# Altium PCB Pedal Board.PcbDoc
Units mm, origin at the board's own origin, x right, y up, seen from the top; angles counter-clockwise.
Board outline 50 x 50 mm, 2 copper layers (Top Layer, Bottom Layer); 56 components, 29 nets, 193 pads, 105 vias.
Unrouted connection lines stored in the file: 36.
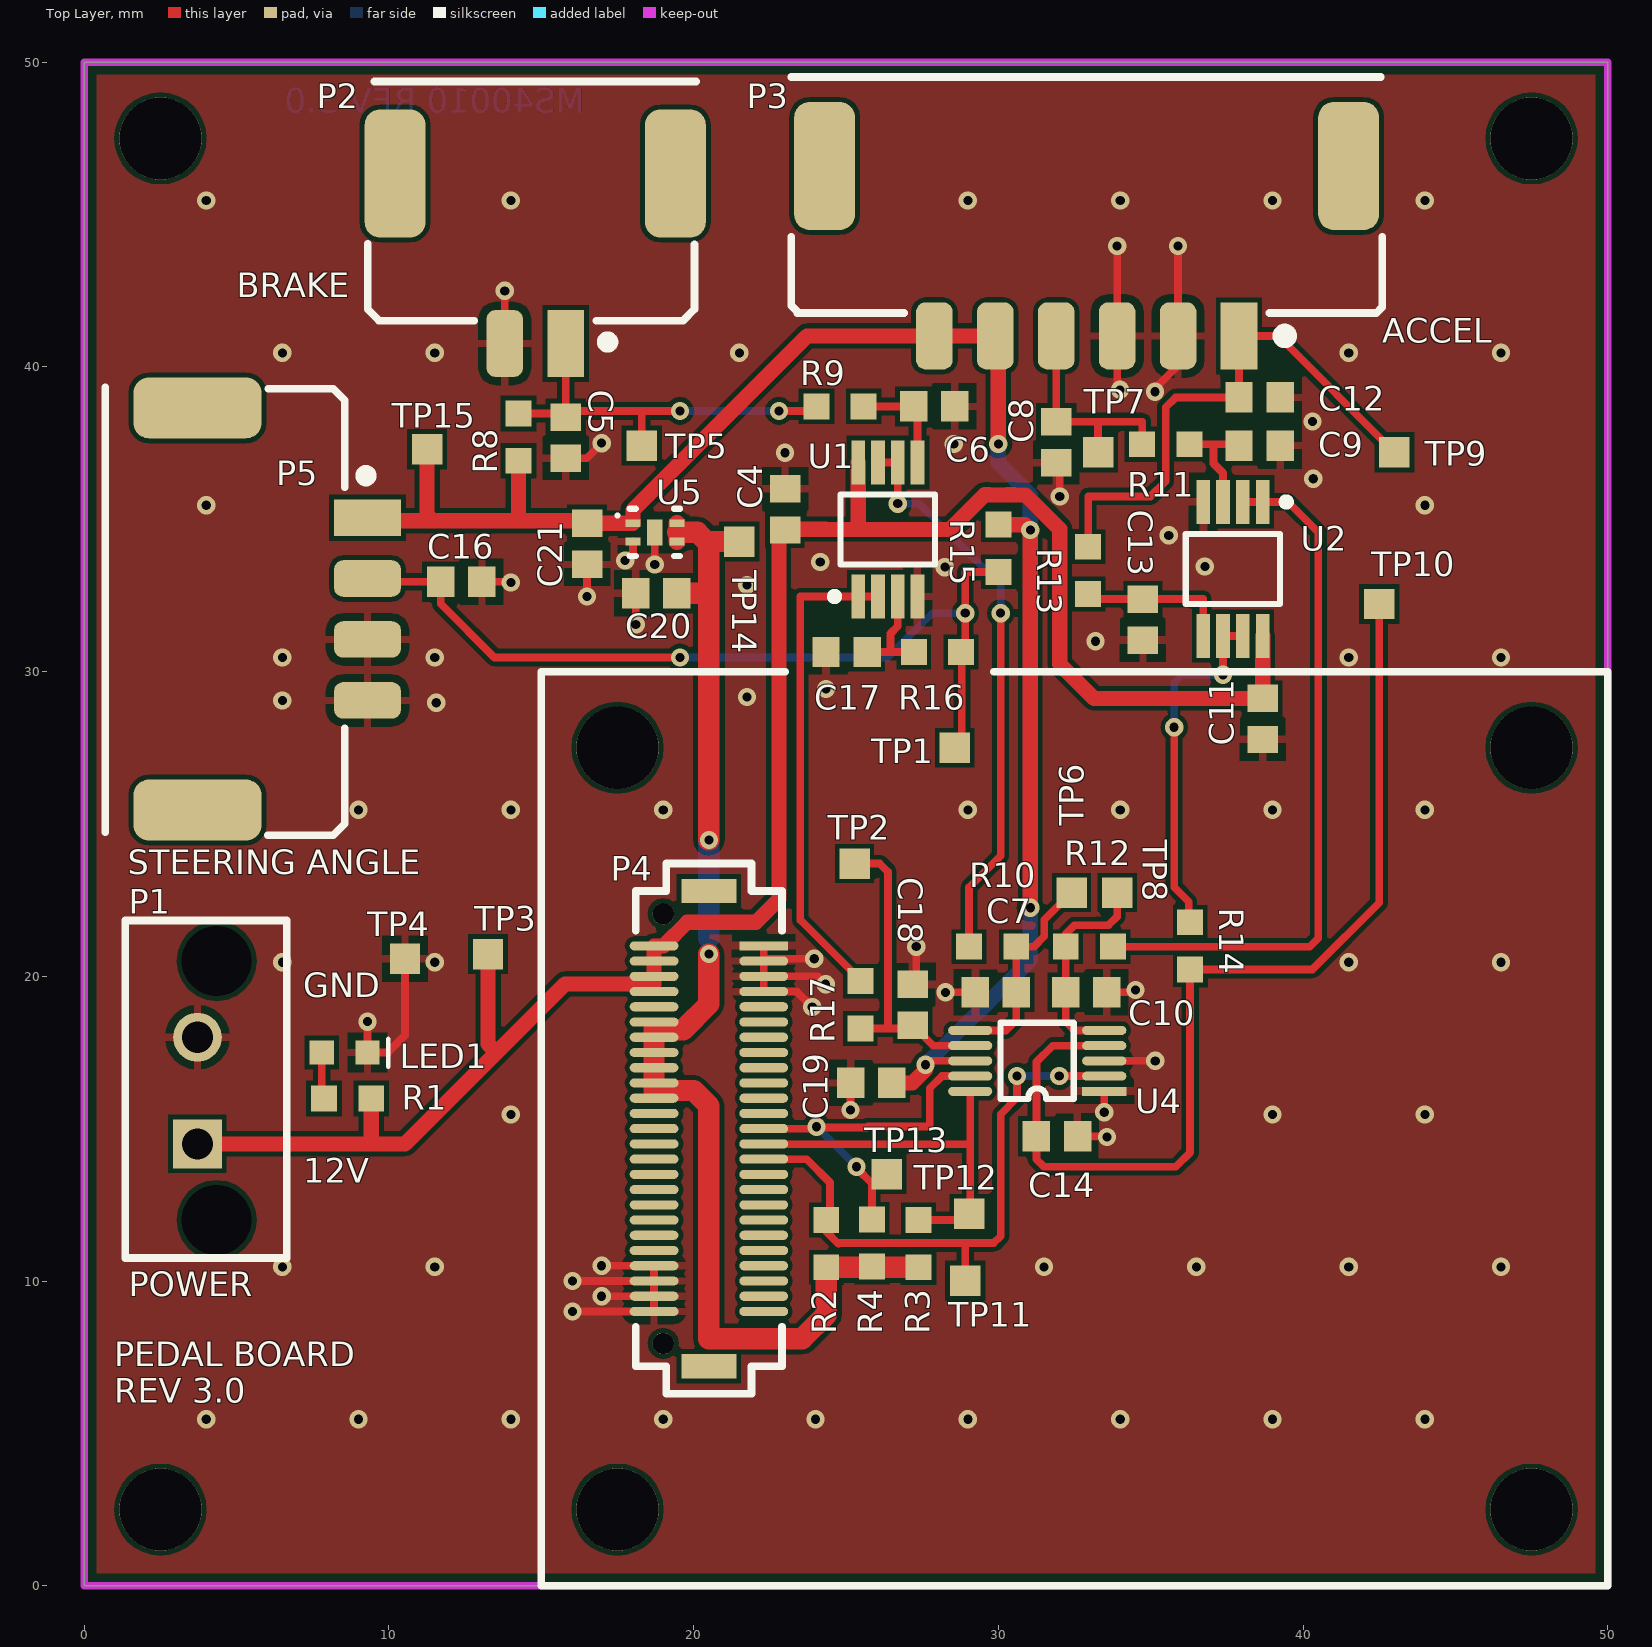
[diagram p0: Top Layer view]
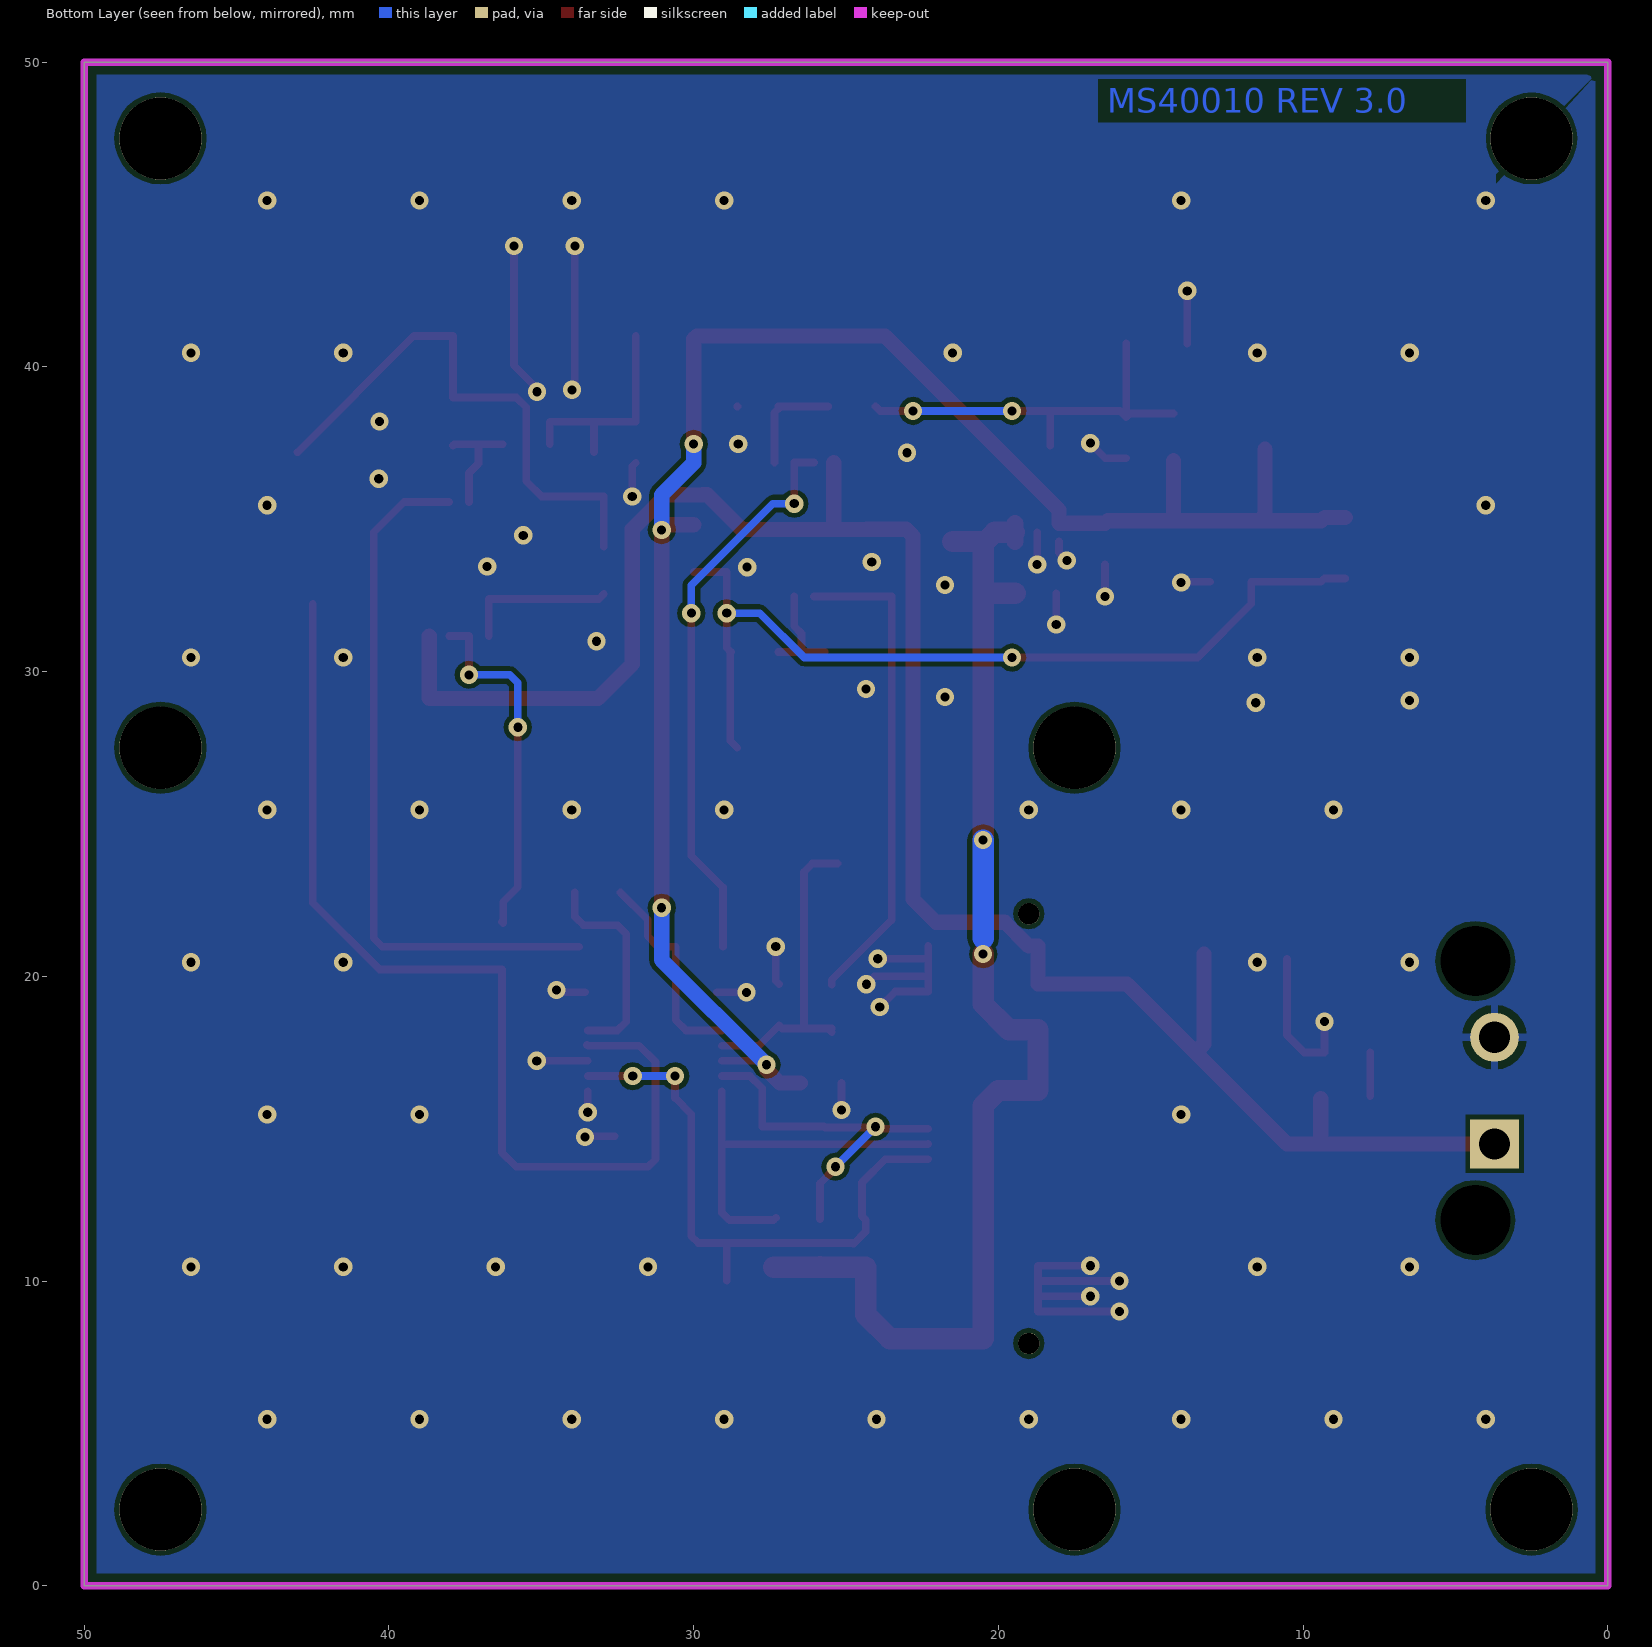
[diagram p1: Bottom Layer view, seen from below]
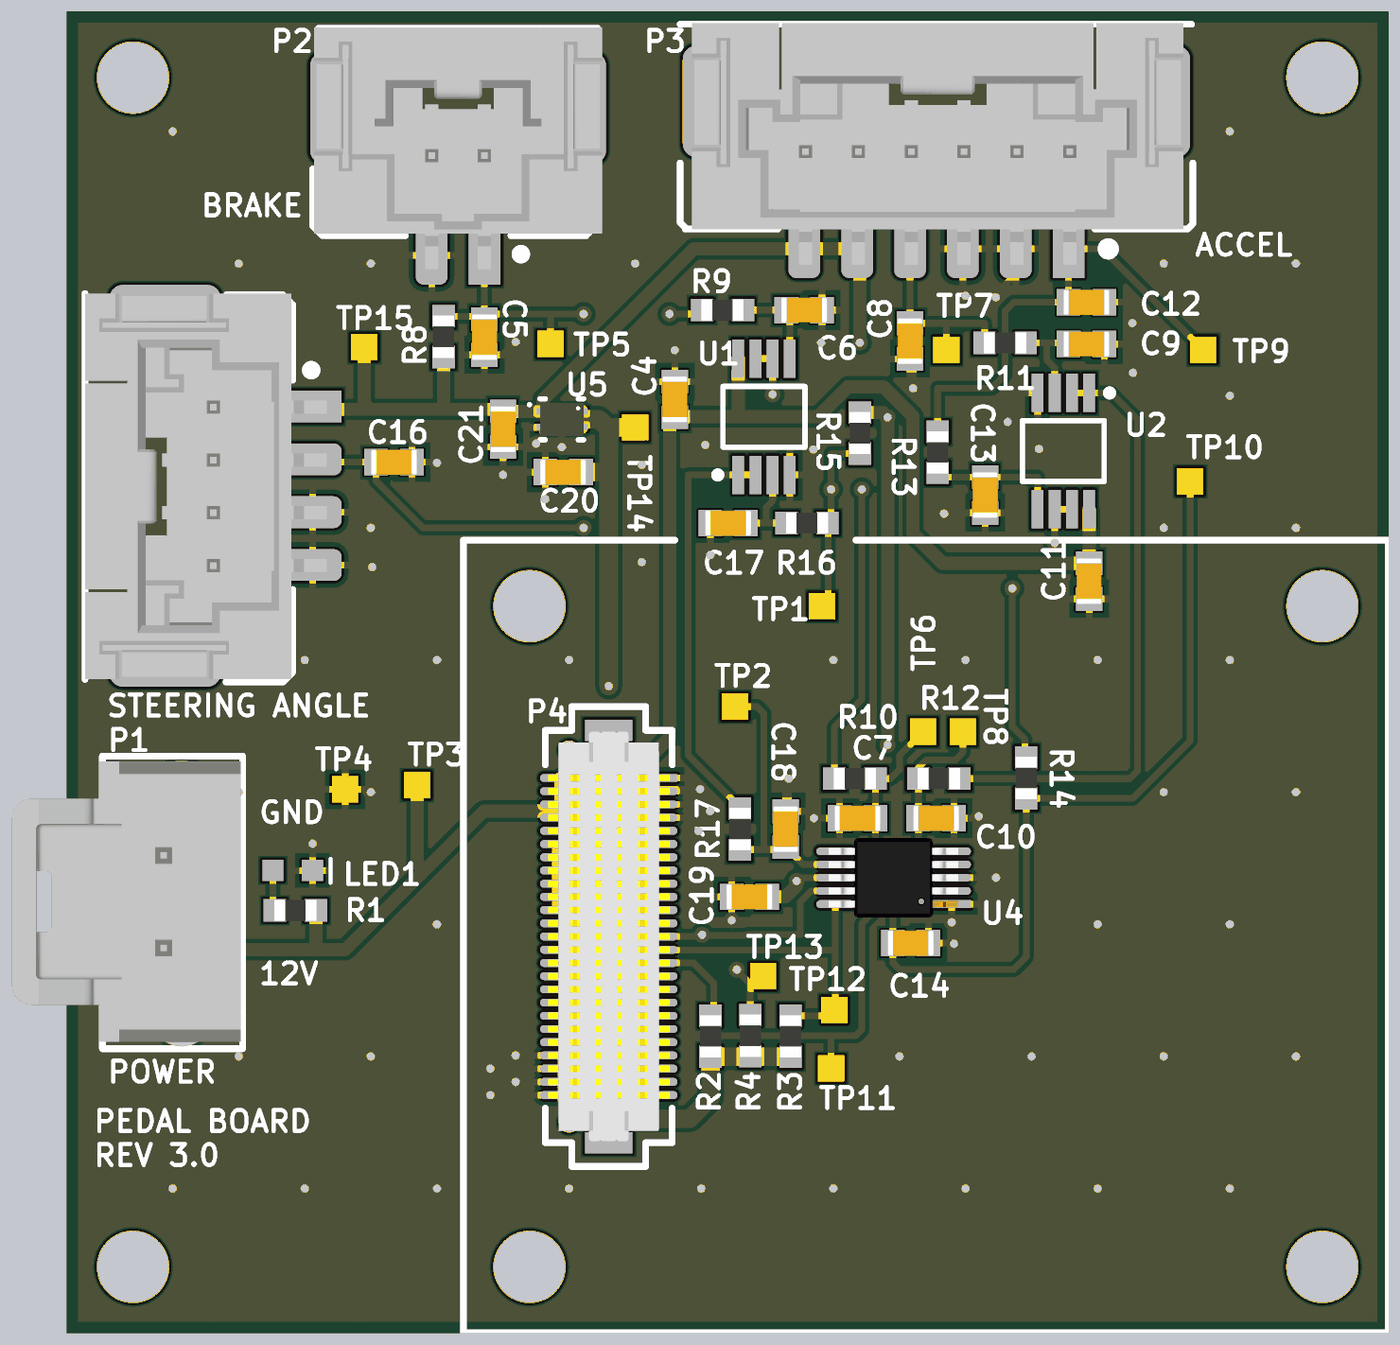
[diagram p2: 3D render of the assembled board from above, using the file's embedded part models]

## Layer stack, top to bottom
Top Solder: solder mask 0.0102, Solder Resist, Dk 3.5
Top Layer: signal copper 0.0356
Dielectric 1: dielectric 0.32, FR-4, Dk 4.8
Bottom Layer: signal copper 0.0356
Bottom Solder: solder mask 0.0102, Solder Resist, Dk 3.5

## Board outline
0,0 0,50 50,50 50,0

## Design rules (kind name [scope] priority, off if disabled: settings)
BoardOutlineClearance [All] p1: gap=0.406 ignorepadtopadclearanceinfootprint=FALSE
Clearance [All] p1: gap=0.152 ignorepadtopadclearanceinfootprint=FALSE except(0: Arc-Hole Track-Hole SMDPad-Hole THPad-Hole Via-Hole Fill-Hole Poly-Hole Region-Hole Text-Hole)
ComponentClearance ComponentClearance_ControllerBoard [InComponent('P4') vs Identifier = 'Controller_Board'] p1: gap=0 collisioncheckmode=3 verticalgap=0 showdistances=FALSE
ComponentClearance ComponentClearance_Standoffs [Identifier = 'Standoff' vs Identifier = 'Controller_Board'] p2: gap=0 collisioncheckmode=3 verticalgap=0 showdistances=FALSE
ComponentClearance [All] p3: gap=0.254 collisioncheckmode=3 verticalgap=0.254 showdistances=FALSE
HoleSize [All] p1: absolutevalues=TRUE maxlimit=6.3 minlimit=0.3 maxpercent=80.000 minpercent=20.000
MinimumAnnularRing [All] p1: minimumring=0.05
MinimumSolderMaskSliver [All] p1: minsoldermaskwidth=0.1
PolygonConnect [IsPad] p1: connectstyle=Relief reliefconductorwidth=0.254 reliefentries=4 polygonreliefangle="90 Angle" airgapwidth=0.254
PolygonConnect PolygonConnect_NoThermal [Not(IsPad)] p2: connectstyle=Direct reliefconductorwidth=0.254 reliefentries=4 polygonreliefangle="90 Angle" airgapwidth=0.254
RoutingVias [All] p1: holewidth=0.3 width=0.6 viastyle="Through Hole" minholewidth=0.3 minwidth=0.6 maxholewidth=0.711 maxwidth=1.27
SilkToSolderMaskClearance [IsPad] p1: minsilkscreentomaskgap=0.178 clearancetoexposedcopper=TRUE
SolderMaskExpansion [All] p1: expansion=0.102
Width [All] p1: maxlimit=2.54 minlimit=0.152 preferedwidth=0.254
26 further rules are at their usual default settings.

## Classes and differential pairs
component class "Pedal Board - ADC": C19 C20 C21 R2 R3 R4 TP11 TP12 TP13 TP14 TP15 U4 U5
component class PedalBoard: LED1 P1 P2 P3 P4 P5 R1 TP3 TP4
component class PedalBoardAnalogInputs: C4 C5 C6 C7 C8 C9 C10 C11 C12 C13 C14 C16 C17 C18 R8 R9 R10 R11 R12 R13 R14 R15 R16 R17 TP1 TP2 TP5 TP6 TP7 TP8 TP9 TP10 U1 U2

## Components (designator, comment, footprint, x,y, rotation, side; value= is the part's Value field where it differs from the comment)
C4 "CAP CER 10nF 50V 5% X7R 0603" "CAP, 0603" 23,35.325 r90 top
C5 "CAP CER 10nF 50V 5% X7R 0603" "CAP, 0603" 15.8,37.682 r270 top
C6 "CAP CER 0.1UF 50V 10% X7R 0603" "CAP, 0603" 27.895,38.707 r0 top
C7 "CAP CER 10nF 50V 5% X7R 0603" "CAP, 0603" 29.914,19.475 r180 top
C8 "CAP CER 10nF 50V 5% X7R 0603" "CAP, 0603" 31.9,37.532 r270 top
C9 "CAP CER 0.1UF 50V 10% X7R 0603" "CAP, 0603" 38.575,37.421 r0 top
C10 "CAP CER 10nF 50V 5% X7R 0603" "CAP, 0603" 32.889,19.475 r0 top
C11 "CAP CER 10nF 50V 5% X7R 0603" "CAP, 0603" 38.675,28.447 r270 top
C12 "CAP CER 10nF 50V 5% X7R 0603" "CAP, 0603" 38.575,39 r0 top
C13 "CAP CER 0.1UF 50V 10% X7R 0603" "CAP, 0603" 34.745,31.707 r270 top
C14 "CAP CER 10nF 50V 5% X7R 0603" "CAP, 0603" 31.925,14.75 r0 top
C16 "CAP CER 10nF 50V 5% X7R 0603" "CAP, 0603" 12.375,32.95 r0 top
C17 "CAP CER 0.1UF 50V 10% X7R 0603" "CAP, 0603" 25.019,30.646 r180 top
C18 "CAP CER 10nF 50V 5% X7R 0603" "CAP, 0603" 27.195,19.066 r90 top
C19 "CAP CER 0.1UF 50V 10% X7R 0603" "CAP, 0603" 25.825,16.5 r180 top
C20 "CAP CER 1UF 50V 10% X7R 0603" "CAP, 0603" 18.775,32.571 r180 top
C21 "CAP CER 1UF 50V 10% X7R 0603" "CAP, 0603" 16.5,34.196 r270 top
LED1 "LED GREEN CLEAR 2V 0603" LED_0603 7.844,17.49 r0 top
P1 "CONN 2POS ULTRA-FIT 0.138\"" "CONN, 2POS ULTRA-FIT" 3.714,14.5 r90 top
P2 "DURA-CLIK" "CONN, 2POS Dura-Click Vertical" 15.8,40.77 r180 top
P3 "DURA-CLIK" "CONN, 6POS DURA-CLIK VERT" 37.9,41.02 r180 top
P4 "CONN 50POS Bergstak Plug 0.02\"" "CONN, Bergstak 50 Pos Plug" 20.5,15 r0 top locked
P5 "Dura-Clik" "CONN, 4POS DURA-CLIK VERT" 9.294,35.057 r270 top
R1 "RES 4.7K OHM 1% 1/10W 0603" "RES, 0603" 8.644,15.99 r180 top
R2 "RES 4.7K OHM 1% 1/10W 0603" "RES, 0603" 24.351,11.225 r90 top
R3 "RES 4.7K OHM 1% 1/10W 0603" "RES, 0603" 27.382,11.225 r90 top
R4 "RES 4.7K OHM 1% 1/10W 0603" "RES, 0603" 25.857,11.25 r90 top
R8 "RES 1K" "RES, 0603" 14.25,37.698 r90 top
R9 "RES 15K" "RES, 0603" 24.805,38.707 r180 top
R10 "RES 100 OHM 1% 1/10W 0603" "RES, 0603" 29.814,20.975 r180 top
R11 "RES 15K" "RES, 0603" 35.496,37.465 r180 top
R12 "RES 100 OHM 1% 1/10W 0603" "RES, 0603" 32.989,20.975 r0 top
R13 "RES 15K" "RES, 0603" 32.947,33.325 r90 top
R14 "RES 100 OHM 1% 1/10W 0603" "RES, 0603" 36.295,21 r90 top
R15 "RES 1K" "RES, 0603" 30,34.05 r270 top
R16 "RES 15K" "RES, 0603" 28.003,30.646 r0 top
R17 "RES 100 OHM 1% 1/10W 0603" "RES, 0603" 25.47,19.066 r90 top
TP1 "Test Point" "Test Point"#1 28.57,27.5 r90 top
TP2 "Test Point" "Test Point"#1 25.282,23.7 r90 top
TP3 "Test Point" "Test Point"#1 13.25,20.73 r90 top
TP4 "Test Point" "Test Point"#1 10.525,20.575 r90 top
TP5 "Test Point" "Test Point"#1 18.295,37.421 r90 top
TP6 "Test Point" "Test Point"#1 32.405,22.75 r90 top
TP7 "Test Point" "Test Point"#1 33.275,37.202 r90 top
TP8 "Test Point" "Test Point"#1 33.9,22.75 r90 top
TP9 "Test Point" "Test Point"#1 43,37.202 r90 top
TP10 "Test Point" "Test Point"#1 42.5,32.221 r90 top
TP11 "Test Point" "Test Point"#1 28.915,10.005 r90 top
TP12 "Test Point" "Test Point"#2 29.039,11.751 r90 top
TP13 "Test Point" "Test Point"#1 26.342,13.5 r90 top
TP14 "Test Point" "Test Point"#1 21.5,34.271 r90 top
TP15 "Test Point" "Test Point"#1 11.25,37.298 r90 top
U1 "IC OP AMP DUAL GP RR 10MHZ 8-VSSOP" "IC OP AMP DUAL 8-VSSOP" 26.375,34.666 r90 top
U2 "IC OP AMP DUAL GP RR 10MHZ 8-VSSOP" "IC OP AMP DUAL 8-VSSOP" 37.7,33.371 r270 top
U4 "Quad ADC" "IC ADC VSSOP10" 33.476,16.225 r180 top
U5 "IC REG LDO 3V 0.2A 4-TDFN" "IC REG LDO 3V 0.2A 4-TDFN" 18.01,34.871 r270 top

## Footprints (in the part's own frame and the unit in brackets; to place one, negate y for a bottom-side part, rotate by r counter-clockwise, add the part's x,y. Pads: shape width x height; smd on the part's side, far side on the other; paste and mask are expansions set on the pad)
"CAP, 0603" [mm] "Chip Capacitor, 2-Leads, Body 1.60x0.81mm, IPC Medium Density"
  rect 0.9x1 smd mask+0.076: 1(-0.675,0) 2(0.675,0)
  body extent -0.87,-0.48 0.87,0.48, height 0.9
"CONN, 2POS Dura-Click Vertical" [mm] "WM7169CT-ND"
  rect 1.2x2.2 smd: 1(0,0)
  rrect50% 1.2x2.2 smd: 2(2,0)
  rrect50% 2x4.2 smd: 3(-3.6,-5.58) 3(5.6,-5.58)
  silkscreen extent -4.28,-8.6 6.5,0.05, body extent -4.45,-8.63 6.45,0.52, height 8
"CONN, 2POS ULTRA-FIT" [mm] "2 Positions Header, Shrouded Connector 0.138\" (3.50mm) Through Hole Gold"
  rect 1.6x1.6 hole 1.02: 1(0,0)
  round 1.6 hole 1.02: 2(3.5,0)
  round 1.6 hole 2.3: ""(-2.5,-0.63) ""(6,-0.63)
  silkscreen extent -3.74,-2.93 7.33,2.37, body extent -3.48,-2.87 7.12,5.79, height 13.85
"CONN, 4POS DURA-CLIK VERT" [mm]
  rect 1.2x2.2 smd: 1(0,0)
  rrect50% 1.2x2.2 smd: 2(2,0) 3(4,0) 4(6,0)
  rrect50% 2x4.2 smd: 7(-3.6,-5.58) 7(9.6,-5.58)
  silkscreen extent -4.28,-8.61 10.42,0.05, body extent -4.28,-8.61 10.32,0.54, height 8
"CONN, 6POS DURA-CLIK VERT" [mm]
  rect 1.2x2.2 smd: 1(0,0)
  rrect50% 1.2x2.2 smd: 2(2,0) 3(4,0) 4(6,0) 5(8,0) 6(10,0)
  rrect50% 2x4.2 smd: 7(-3.6,-5.58) 7(13.6,-5.58)
  silkscreen extent -4.7,-8.5 14.7,0.15, body extent -4.35,-8.54 14.25,0.61, height 7.97
"CONN, Bergstak 50 Pos Plug" [mm] "Bergstak 50 Position Plug"
  rect 1.6x0.3 smd: 1(1.8,6)
  oval 1.6x0.3 smd: 2(1.8,5.5) 3(1.8,5) 4(1.8,4.5) 5(1.8,4) 6(1.8,3.5) 7(1.8,3) 8(1.8,2.5) 9(1.8,2) 10(1.8,1.5) 11(1.8,1) 12(1.8,0.5) 13(1.8,0) 14(1.8,-0.5) 15(1.8,-1) 16(1.8,-1.5) 17(1.8,-2) 18(1.8,-2.5) 19(1.8,-3) 20(1.8,-3.5) 21(1.8,-4) 22(1.8,-4.5) 23(1.8,-5) 24(1.8,-5.5) 25(1.8,-6) 26(-1.8,-6) 27(-1.8,-5.5) 28(-1.8,-5) 29(-1.8,-4.5) 30(-1.8,-4) 31(-1.8,-3.5) 32(-1.8,-3) 33(-1.8,-2.5) 34(-1.8,-2) 35(-1.8,-1.5) 36(-1.8,-1) 37(-1.8,-0.5) 38(-1.8,0) 39(-1.8,0.5) 40(-1.8,1) 41(-1.8,1.5) 42(-1.8,2) 43(-1.8,2.5) 44(-1.8,3) 45(-1.8,3.5) 46(-1.8,4) 47(-1.8,4.5) 48(-1.8,5) 49(-1.8,5.5) 50(-1.8,6)
  round 0.7 hole 0.7: ""(-1.5,-7.05) ""(-1.5,7.05)
  rect 1.8x0.8 smd: ""(0,-7.8) ""(0,7.8)
  silkscreen extent -2.4,-8.7 2.4,8.7, body extent -2.3,-7.75 2.3,7.75, height 4.2
"IC ADC VSSOP10" [mm]
  rect 1.45x0.3 smd: 1(0,0)
  oval 1.45x0.3 smd: 2(0,-0.5) 3(0,-1) 4(0,-1.5) 5(0,-2) 6(4.4,-2) 7(4.4,-1.5) 8(4.4,-1) 9(4.4,-0.5) 10(4.4,0)
  silkscreen extent 1,-2.25 3.4,0.25, body extent -0.25,-2.5 4.65,0.5, height 1.15
"IC OP AMP DUAL 8-VSSOP" [mm] "VSSOP 8-Leads, Body 3.00x3.00mm, Pitch 0.65mm, IPC Medium Density"
  rect 1.45x0.45 smd: 1(-2.2,0.975) 2(-2.2,0.325) 3(-2.2,-0.325) 4(-2.2,-0.975) 5(2.2,-0.975) 6(2.2,-0.325) 7(2.2,0.325) 8(2.2,0.975)
  silkscreen extent -2.32,-1.55 1.15,1.87, body extent -1.55,-1.55 1.55,1.55, height 1.1
"IC REG LDO 3V 0.2A 4-TDFN" [mm] "QFN, 4-Leads, Body 1.20x1.60mm, Pitch 0.50mm/1.40mm, Thermal Pad 0.86x0.50mm, IPC Medium Density"
  rect 0.25x0.5 smd: 1(0,0) 2(0.6,0) 3(0.6,1.44) 4(0,1.44)
  rect 0.86x0.5 smd: 5(0.3,0.715)
  silkscreen extent -0.48,-0.56 1.07,1.54, body extent -0.33,-0.11 0.92,1.54, height 0.6
LED_0603 [mm]
  rect 0.8x0.8 smd: 1(-0.05,0.01) 2(1.45,0.01)
  silkscreen extent 2.13,-0.46 2.13,0.45, body extent -0.09,-0.39 1.51,0.41, height 0.8
"RES, 0603" [mm] "Chip Resistor, 2-Leads, Body 1.60x0.80mm, IPC Medium Density"
  rect 0.85x0.85 smd: 1(-0.775,0) 2(0.775,0)
  body extent -0.8,-0.4 0.8,0.4, height 0.55
"Test Point"#1 [mm]
  rect 1x1 smd paste-2: TP(0,0)
"Test Point"#2 [mm]
  rect 1x1 smd paste-2: TP(0.464,0)

## Part data
C4 C5 C7 C8 C10 C11 C12 C14 C16 C18: "10000pF ±5% 50V Ceramic Capacitor U2J 0603 (1608 Metric)", Capacitance=10000pF, Manufacturer 1=KEMET, Manufacturer Part Number 1=C0603C103J5JAC7867, Operating Temperature="-55°C ~ 125°C", Package / Case="0603 (1608 Metric)", Ratings=-, Supplier Part Number 1=399-13384-1-ND, Temperature Coefficient=U2J, Tolerance=±5%, Voltage=50V, ComponentLink1Description=http://www.kemet.com/docfinder?Partnumber=C0603C103J5JAC7867, ComponentLink1URL=http://www.kemet.com/docfinder?Partnumber=C0603C103J5JAC7867, Failure Rate=-, Height - Seated (Max)=-, Lead Spacing=-, Lead Style=-, Mounting Type="Surface Mount, MLCC", Packaging="Cut Tape (CT)", Part Status=Active, Size / Dimension="0.063\" L x 0.032\" W (1.60mm x 0.80mm)", Supplier 1=Digi-Key, Thickness (Max)="0.034\" (0.87mm)"
C6 C9 C13 C17 C19: "0.10µF ±10% 50V Ceramic Capacitor X7R 0603 (1608 Metric)", Capacitance=0.1µF, Manufacturer 1="AVX Corporation", Manufacturer Part Number 1=06035C104KAT2A, Operating Temperature="-55°C ~ 125°C", Package / Case="0603 (1608 Metric)", Ratings=-, Supplier Part Number 1=478-5052-1-ND, Temperature Coefficient=X7R, Tolerance=±10%, Voltage=50V, ComponentLink1Description=http://datasheets.avx.com/X7RDielectric.pdf, ComponentLink1URL=http://datasheets.avx.com/X7RDielectric.pdf, Height - Seated (Max)=-, Lead Spacing=-, Lead Style=-, Mounting Type="Surface Mount, MLCC", Packaging="Cut Tape (CT)", Part Status=Active, Size / Dimension="0.063\" L x 0.032\" W (1.60mm x 0.81mm)", Supplier 1=Digi-Key, Thickness (Max)="0.035\" (0.90mm)"
C20 C21: "1µF ±10% 50V Ceramic Capacitor X7R 0603 (1608 Metric)", Capacitance=1µF, Manufacturer 1="Taiyo Yuden", Manufacturer Part Number 1=UMK107AB7105KA-T, Operating Temperature="-55°C ~ 125°C", Package / Case="0603 (1608 Metric)", Ratings=-, Supplier Part Number 1=587-3247-1-ND, Temperature Coefficient=X7R, Tolerance=±10%, Voltage=50V, ComponentLink1Description=http://www.yuden.co.jp/productdata/catalog/en/mlcc_all_e.pdf, ComponentLink1URL=http://www.yuden.co.jp/productdata/catalog/en/mlcc_all_e.pdf, Height - Seated (Max)=-, Lead Spacing=-, Lead Style=-, Mounting Type="Surface Mount, MLCC", Packaging="Cut Tape (CT)", Part Status=Active, Size / Dimension="0.063\" L x 0.031\" W (1.60mm x 0.80mm)", Supplier 1=Digi-Key, Thickness (Max)="0.037\" (0.95mm)"
LED1: "Green 572nm LED Indication - Discrete 2V 0603 (1608 Metric)", Color=Green, Current - Test=20mA, Lens Color=Colorless, Manufacturer="Wurth Electronics Inc.", Manufacturer Part Number=150060VS75000, Millicandela Rating=40mcd, Package / Case="0603 (1608 Metric)", Supplier Device Package=0603, Supplier Part Number 1=732-4980-1-ND, Voltage - Forward (Vf) (Typ)=2V, Category=Optoelectronics, ComponentLink1Description=http://katalog.we-online.de/led/datasheet/150060VS75000.pdf, ComponentLink1URL=http://katalog.we-online.de/led/datasheet/150060VS75000.pdf, Features=-, Height (Max)=0.80mm, Lens Style/Size="Rectangle with Flat Top, 1.10mm x 0.70mm", Lens Transparency=Clear, Mounting Type="Surface Mount", Packaging="Cut Tape (CT)", Part Status=Active, Pricing 1="1=0.21, 100=0.1617, 500=0.13964 (CAD)", RoHS="RoHS Compliant", Size / Dimension="1.60mm L x 0.80mm W", Stock 1=9408, Supplier 1=Digi-Key, Viewing Angle=140°, Wavelength - Dominant=570nm, Wavelength - Peak=572nm
P1: "2 Positions Header, Shrouded Connector 0.138\" (3.50mm) Through Hole Gold", Current Rating=-, Insulation Color=Black, Manufacturer 1="Molex, LLC", Manufacturer Part Number 1=1722861302, Material Flammability Rating="UL94 V-0", Operating Temperature="-40°C ~ 120°C", Supplier Part Number 1=WM11673-ND, Voltage=400V, ComponentLink1Description=http://www.molex.com/pdm_docs/sd/1722861302_sd.pdf, ComponentLink1URL=http://www.molex.com/pdm_docs/sd/1722861302_sd.pdf, Connector Type=Header, Contact Finish - Mating=Gold, Contact Finish - Post=Tin, Contact Finish Thickness - Mating="30µin (0.76µm)", Contact Finish Thickness - Post="60µin (1.52µm)", Contact Length - Mating=-, Contact Length - Post="0.126\" (3.20mm)", Contact Material="Copper Alloy", Contact Shape=Square, Contact Type="Male Pin", Fastening Type="Latch Holder", Ingress Protection=-, Insulation Height="0.465\" (11.80mm)", Insulation Material="Liquid Crystal Polymer (LCP)", Mated Stacking Heights=26.99mm, Mounting Type="Through Hole", Number of Positions=2, Number of Positions Loaded=All, Number of Rows=1, Overall Contact Length=-, Packaging=Tray, Part Status=Active, Pitch - Mating="0.138\" (3.50mm)", Row Spacing - Mating=-, Series=UltraFit, Shrouding="Shrouded - 4 Wall", Style="Board to Board or Cable", Supplier 1=Digi-Key, Termination="Kinked Pin, Solder"
P2: library part "CONN 2POS DURA-CLIK 0.079\" VERT", "2 Positions Header, Shrouded Connector 0.079\" (2.00mm) Surface Mount, Vertical Tin", Current Rating=-, Insulation Color=Natural, Manufacturer="Molex, LLC", Manufacturer Part Number=5600200220, Supplier Part Number 1=WM10862CT-ND, Applications="Automotive, Industrial", Category="Connectors, Interconnects", ComponentLink1Description=http://www.molex.com/pdm_docs/sd/5600200220_sd.pdf, ComponentLink1URL=http://www.molex.com/pdm_docs/sd/5600200220_sd.pdf, Connector Type=Header, Contact Finish - Mating=Tin, Contact Finish - Post=Tin, Contact Finish Thickness - Mating=-, Contact Finish Thickness - Post=-, Contact Length - Mating=-, Contact Length - Post=-, Contact Material="Copper Alloy", Contact Shape=Square, Contact Type="Male Pin", Fastening Type="Latch Lock", Features="Solder Retention", Ingress Protection=-, Insulation Height="0.315\" (8.00mm)", Insulation Material="Polyamide (PA), Nylon", Mated Stacking Heights=9.3mm, Material Flammability Rating=-, Mounting Type="Surface Mount", Number of Positions=2, Number of Positions Loaded=All, Number of Rows=1, Operating Temperature=-, Overall Contact Length=-, Packaging="Cut Tape (CT)", Part Status=Active, Pitch - Mating="0.079\" (2.00mm)", Pricing 1="1=1.16, 10=1.012, 25=0.952, 50=0.9122, 100=0.8727, 250=0.79336 (CAD)", RoHS="RoHS Compliant", Row Spacing - Mating=-, Shrouding="Shrouded - 4 Wall", Stock 1=11912, Style="Board to Cable/Wire", Supplier 1=Digi-Key, Termination=Solder, Voltage Rating=-
P3: library part "CONN 6POS DURA-CLIK 0.079\"", "6 Positions Header, Shrouded Connector 0.079\" (2.00mm) Surface Mount, Vertical Tin", Current Rating=-, Insulation Color=Natural, Manufacturer=Molex, Manufacturer Part Number=5600200820, Supplier Part Number 1=WM10866CT-ND, Applications="Automotive, Industrial", Category="Connectors, Interconnects", ComponentLink1Description=http://www.molex.com/pdm_docs/sd/5600200220_sd.pdf, ComponentLink1URL=http://www.molex.com/pdm_docs/sd/5600200220_sd.pdf, Connector Type=Header, Contact Finish - Mating=Tin, Contact Finish - Post=Tin, Contact Finish Thickness - Mating=-, Contact Finish Thickness - Post=-, Contact Length - Mating=-, Contact Length - Post=-, Contact Material="Copper Alloy", Contact Shape=Square, Contact Type="Male Pin", Fastening Type="Latch Lock", Features="Solder Retention", Ingress Protection=-, Insulation Height="0.315\" (8.00mm)", Insulation Material="Polyamide (PA), Nylon", Mated Stacking Heights=9.3mm, Material Flammability Rating=-, Mounting Type="Surface Mount", Number of Positions=6, Number of Positions Loaded=All, Number of Rows=1, Operating Temperature=-, Overall Contact Length=-, Packaging="Cut Tape (CT)", Part Status=Active, Pitch - Mating="0.079\" (2.00mm)", Pricing 1="1=1.76, 10=1.542, 25=1.4512, 50=1.391, 100=1.3305, 250=1.20956 (CAD)", RoHS="RoHS Compliant", Row Spacing - Mating=-, Shrouding="Shrouded - 4 Wall", Stock 1=3826, Style="Board to Cable/Wire", Supplier 1=Digi-Key, Termination=Solder, Voltage Rating=-
P4: "50 Position Connector Plug, Outer Shroud Contacts Surface Mount Gold", Manufacturer 1="Amphenol FCI", Manufacturer Part Number 1=10132797-055100LF, Supplier Part Number 1=609-5226-1-ND, ComponentLink1Description=http://portal.fciconnect.com/Comergent//fci/drawing/10132797.pdf, ComponentLink1URL=http://portal.fciconnect.com/Comergent//fci/drawing/10132797.pdf, Connector Type="Plug, Outer Shroud Contacts", Contact Finish=Gold, Contact Finish Thickness="1µin (0.025µm)", Height Above Board="0.169\" (4.30mm)", Mated Stacking Heights=5mm, Mounting Type="Surface Mount", Number of Positions=50, Number of Rows=2, Packaging="Cut Tape (CT)", Part Status=Active, Pitch="0.020\" (0.50mm)", Series="BergStak Plug", Supplier 1=Digi-Key
P5: library part "CONN 4POS DURA-CLIK 0.079\"", "4 Positions Header Connector 0.079\" (2.00mm) Surface Mount Tin", Current Rating=-, Insulation Color=Natural, Manufacturer="Molex, LLC", Manufacturer Part Number=5600200420, Supplier Part Number 1=WM10864CT-ND, Applications="Automotive, Industrial", Category="Connectors, Interconnects", ComponentLink1Description=http://www.molex.com/pdm_docs/sd/5600200420_sd.pdf, ComponentLink1URL=http://www.molex.com/pdm_docs/sd/5600200420_sd.pdf, Connector Type=Header, Contact Finish - Mating=Tin, Contact Finish - Post=Tin, Contact Finish Thickness - Mating=-, Contact Finish Thickness - Post=-, Contact Length - Mating=-, Contact Length - Post=-, Contact Material="Copper Alloy", Contact Shape=Square, Contact Type="Male Pin", Fastening Type="Latch Lock", Features="Solder Retention", Ingress Protection=-, Insulation Height="0.315\" (8.00mm)", Insulation Material="Polyamide (PA), Nylon", Mated Stacking Heights=9.3mm, Material Flammability Rating=-, Mounting Type="Surface Mount", Number of Positions=4, Number of Positions Loaded=All, Number of Rows=1, Operating Temperature=-, Overall Contact Length=-, Packaging="Cut Tape (CT)", Part Status=Active, Pitch - Mating="0.079\" (2.00mm)", Pricing 1="1=2.23, 10=2.022, 25=1.898, 50=1.8156, 100=1.733 (CAD)", RoHS="RoHS Compliant", Row Spacing - Mating=-, Shrouding="Shrouded - 4 Wall", Stock 1=9367, Style="Board to Cable/Wire", Supplier 1=Digi-Key, Termination=Solder, Voltage Rating=-
R1 R2 R3 R4: "4.7k Ohm ±1% 0.1W, 1/10W Chip Resistor 0603 (1608 Metric) Moisture Resistant Thick Film", Manufacturer 1=Yageo, Manufacturer Part Number 1=RC0603FR-074K7L, Operating Temperature="-55°C ~ 155°C", Package / Case="0603 (1608 Metric)", Power (Watts)=1/10W, Resistance (Ohms)=4.7k, Supplier Device Package=0603, Supplier Part Number 1=311-4.70KHRCT-ND, Temperature Coefficient=±100ppm/°C, Tolerance=±1%, Category=Resistors, ComponentLink1Description=http://www.yageo.com/documents/recent/PYu-RC_Group_51_RoHS_L_7.pdf, ComponentLink1URL=http://www.yageo.com/documents/recent/PYu-RC_Group_51_RoHS_L_7.pdf, Composition="Thick Film", Description 1="RES SMD 4.7K OHM 1% 1/10W 0603", Failure Rate=-, Features="Moisture Resistant", Height - Seated (Max)="0.022\" (0.55mm)", Packaging="Cut Tape (CT)", Part Status=Active, Pricing 1="1=0.16, 10=0.022, 100=0.0089, 1000=0.00402, 2500=0.00349 (CAD)", RoHS="RoHS Compliant", Size / Dimension="0.063\" L x 0.031\" W (1.60mm x 0.80mm)", Stock 1=3487566, Supplier 1=Digi-Key
R8: library part "RES 10K OHM 1% 1/10W 0603", "RES 10K", Manufacturer 1=Yageo, Manufacturer Part Number 1=RC0603FR-0710KL, Operating Temperature="-55°C ~ 155°C", Package / Case="0603 (1608 Metric)", Power=1/10W, Resistance=10k, Supplier Device Package=0603, Supplier Part Number 1=311-10.0KHRCT-ND, Temperature Coefficient=±100ppm/°C, Tolerance=±1%, ComponentLink1Description=http://www.yageo.com/documents/recent/PYu-RC_Group_51_RoHS_L_7.pdf, ComponentLink1URL=http://www.yageo.com/documents/recent/PYu-RC_Group_51_RoHS_L_7.pdf, Composition="Thick Film", Failure Rate=-, Height - Seated (Max)="0.022\" (0.55mm)", Packaging="Cut Tape (CT)", Part Status=Active, Size / Dimension="0.063\" L x 0.031\" W (1.60mm x 0.80mm)", Supplier 1=Digi-Key
R9 R11 R13 R16: library part "RES SMD 15K OHM 1% 1/10W 0603", "15 kOhms ±1% 0.1W, 1/10W Chip Resistor 0603 (1608 Metric) Moisture Resistant Thick Film", Case/Package=0603, Case Code (Metric)=1608, Max Operating Temperature=155°C, Max Power Dissipation=100mW, Min Operating Temperature=-55°C, Package Quantity=1, Resistance=15kR, Temperature Coefficient=100ppm/°C, Tolerance=1%, Voltage Rating=50V, Case Code (Imperial)=0603, ComponentLink1Description=Digikey, ComponentLink1URL=https://www.digikey.ca/product-detail/en/yageo/RC0603FR-0715KL/311-15.0KHRCT-ND/729900, Composition="Thick Film", Depth=0.8mm, Features="Moisture Resistant", Height=0.022inch, Lead Free="Lead Free", Length=1.6mm, Military Standard=Not, Number of Pins=2, Number of Terminations=2, Packaging="Tape and Reel", Power Rating=100mW, REACH SVHC=Unknown, Termination=SMD/SMT, Voltage Rating (DC)=50V, Width=0.031inch
R10 R12 R14 R17: "100 Ohm ±1% 0.1W, 1/10W Chip Resistor 0603 (1608 Metric) Moisture Resistant Thick Film", Manufacturer 1=Yageo, Manufacturer Part Number 1=RC0603FR-07100RL, Operating Temperature="-55°C ~ 155°C", Package / Case="0603 (1608 Metric)", Power=1/10W, Resistance=100, Supplier Device Package=0603, Supplier Part Number 1=311-100HRCT-ND, Temperature Coefficient=±100ppm/°C, Tolerance=±1%, ComponentLink1Description=http://www.yageo.com/documents/recent/PYu-RC_Group_51_RoHS_L_7.pdf, ComponentLink1URL=http://www.yageo.com/documents/recent/PYu-RC_Group_51_RoHS_L_7.pdf, Composition="Thick Film", Failure Rate=-, Height - Seated (Max)="0.022\" (0.55mm)", Packaging="Cut Tape (CT)", Part Status=Active, Size / Dimension="0.063\" L x 0.031\" W (1.60mm x 0.80mm)", Supplier 1=Digi-Key
R15: library part "RES 10K OHM 1% 1/10W 0603", "RES SMD 10K OHM 1% 1/10W 0603", Manufacturer 1=Yageo, Manufacturer Part Number 1=RC0603FR-0710KL, Operating Temperature="-55°C ~ 155°C", Package / Case="0603 (1608 Metric)", Power=1/10W, Resistance=10k, Supplier Device Package=0603, Supplier Part Number 1=311-10.0KHRCT-ND, Temperature Coefficient=±100ppm/°C, Tolerance=±1%, ComponentLink1Description=http://www.yageo.com/documents/recent/PYu-RC_Group_51_RoHS_L_7.pdf, ComponentLink1URL=http://www.yageo.com/documents/recent/PYu-RC_Group_51_RoHS_L_7.pdf, Composition="Thick Film", Failure Rate=-, Height - Seated (Max)="0.022\" (0.55mm)", Packaging="Cut Tape (CT)", Part Status=Active, Size / Dimension="0.063\" L x 0.031\" W (1.60mm x 0.80mm)", Supplier 1=Digi-Key
U1 U2: "General Purpose Amplifier 2 Circuit Rail-to-Rail 8-VSSOP", Case/Package=VSSOP, Input Bias Current=5pA, Input Offset Voltage (Vos)=250uV, Manufacturer="Texas Instruments", Manufacturer Part Number=OPA2197IDGKR, Max Operating Temperature=125°C, Min Operating Temperature=-40°C, Operating Supply Current=1mA, Output Current per Channel=65mA, Supplier Part Number 1=296-47349-1-ND, ComponentLink1Description=http://www.ti.com/lit/ds/symlink/opa2197.pdf, ComponentLink1URL=http://www.ti.com/lit/ds/symlink/opa2197.pdf, Gain Bandwidth Product=10MHz, Lead Free="Lead Free", Mount="Surface Mount", Number of Channels=2, Number of Circuits=2, Packaging="Tape and Reel", Pricing 1="1=2.41, 10=2.162, 100=1.7376, 500=1.4276, 1000=1.1829 (USD)", Slew Rate=20V/µs, Stock 1=2171, Supplier 1=Digi-Key
U4: library part "IC ADC 12-BIT VSSOP-10", "12 Bit Analog to Digital Converter 4 Input 1 Sigma-Delta 10-VSSOP", Manufacturer="Texas Instruments", Manufacturer Part Number=ADS1015IDGSR, Operating Temperature="-40°C ~ 125°C", Package / Case="10-TFSOP, 10-MSOP (0.118\", 3.00mm Width)", Supplier Device Package=10-VSSOP, Supplier Part Number 1=296-41185-1-ND, Voltage - Supply, Analog="2 V ~ 5.5 V", Architecture=Sigma-Delta, Category="Integrated Circuits (ICs)", ComponentLink1Description=http://www.ti.com/lit/ds/symlink/ads1013.pdf, ComponentLink1URL=http://www.ti.com/lit/ds/symlink/ads1013.pdf, Configuration=MUX-PGA-ADC, Data Interface=I²C, Features="PGA, Selectable Address", Input Type="Differential, Single Ended", Number of A/D Converters=1, Number of Bits=12, Number of Inputs="2, 4", Packaging="Cut Tape (CT)", Part Status=Active, Pricing 1="1=4.25, 10=3.807, 100=3.1194, 500=2.65552, 1000=2.23959 (CAD)", Ratio - S/H:ADC=-, Reference Type=Internal, RoHS="RoHS Compliant", Sampling Rate (Per Second)=3.3k, Stock 1=4084, Supplier 1=Digi-Key, Voltage - Supply, Digital="2 V ~ 5.5 V"
U5: Current - Limit (Min)=250mA, Current - Output=200mA, Manufacturer="Microchip Technology", Manufacturer Part Number=MIC94310-PYMT-TR, Operating Temperature="-40°C ~ 125°C", Package / Case="4-UFDFN Exposed Pad", Supplier Device Package="4-TDFN (1.2x1.6)", Supplier Part Number 1=576-4761-1-ND, Voltage - Dropout (Typical)="0.04V @ 200mA", Voltage - Input="Up to 3.6V", Voltage - Output=3V, Category="Integrated Circuits (ICs)", ComponentLink1Description=http://www.microchip.com/mymicrochip/filehandler.aspx?ddocname=en580409, ComponentLink1URL=http://www.microchip.com/mymicrochip/filehandler.aspx?ddocname=en580409, Mounting Type="Surface Mount", Packaging="Cut Tape (CT)", Part Status=Active, Pricing 1="1=0.45, 25=0.3708, 100=0.3386 (CAD)", Regulator Topology="Positive Fixed", RoHS="RoHS Compliant", Stock 1=4802, Supplier 1=Digi-Key

## Free pads (board coordinates)
  round 2.7 hole 2.7: ""(2.5,2.5) ""(2.5,47.5) ""(17.5,2.5) ""(17.5,27.5) ""(47.5,2.5) ""(47.5,27.5) ""(47.5,47.5)

## Via types
v1: diameter 0.6, hole 0.3, Top Layer to Bottom Layer, tented both sides, 105 vias

## Nets (pads, with @x,y where several pads share a name; then routed paths per layer and width w, separated by ;. In a path a pad name is that pad's centre, name@x,y a point inside that pad or via, vN(x,y) a via of type N, cw(c..) or ccw(c..) an arc to the next point about the centre after c; other vN are vias at no path point)
3V0: C19.1 C21.1 P3.5 P3.6 P5.1 R8.1 R15.1 TP15.TP U4.8 U5.1 | length 58.5
  Top Layer w0.254: v1(27.609,17.1) 27.735,17.225 U4.8
  Top Layer w0.5: P5.1@8.61,35.057 P5.1 9.401,34.95 11.443,34.95 ; TP15.TP 11.25,35.143 11.443,34.95 ; R8.1 14.25,34.95 ; C19.1 27.175,16.5 27.609,16.934 v1(27.609,17.1) ; R15.1 30.875,34.825 v1(31.05,34.65) v1(31.05,22.25) ; v1(30,37.471) 30,40.92 P3.5 P3.6 23.72,41.02 18.01,35.31 U5.1 C21.1 16.421,34.95 14.25,34.95 ; 11.443,34.95 14.25,34.95
  Bottom Layer w0.5: v1(27.609,17.1) 31.05,20.541 v1(31.05,22.25) ; v1(30,37.471) 30,36.847 31.05,35.797 v1(31.05,34.65)
3V3: C20.1 P4.40 P4.41 P4.42 P4.43 P4.44 P4.45 R2.1 R3.1 R4.1 TP14.TP U5.3 U5.4 | length 40.8
  Top Layer w0.55: U5.3 U5.4
  Top Layer w0.7: C20.1 20.225,32.571 ; 19.477,34.571 20.125,34.571 20.5,34.196 ; v1(20.5,20.73) 20.5,19.091 19.659,18.25 18.7,18.25 P4.44 P4.43 P4.42 P4.41 18.7,16.25 20,16.25 20.5,15.75 20.5,8.102 23.559,8.102 24.351,8.895 R2.1 25.832,10.45 R4.1 25.882,10.45 R3.1 ; v1(20.5,24.475) 20.5,25.457 20.5,32.846 20.5,34.196 ; TP14.TP 20.575,34.271 20.5,34.196
  Bottom Layer w0.7: 20.5,21.25 20.5,23.7 v1(20.5,24.475)
12V: C4.1 C11.1 P1.1 P4.47 P4.48 P4.49 P4.50 R1.1 TP3.TP U1.8 U2.8 | length 66
  Top Layer w0.5: P1.1 9.444,14.5 ; R1.1 9.419,14.525 9.444,14.5 ; TP3.TP 13.25,17.775 13.525,17.5 ; U1.8 25.4,34.666 ; U2.8 C11.1 33.142,29.122 32.014,30.25 32.014,34.679 30.896,35.798 30.538,35.798 30.531,35.805 30.298,35.805 30.291,35.798 29.709,35.798 29.702,35.805 29.552,35.805 28.414,34.666 25.4,34.666 ; 9.444,14.5 10.525,14.5 13.525,17.5 ; 13.525,17.5 15.775,19.75 18.7,19.75 P4.48 P4.49 P4.50 19.014,21 19.789,21.775 22.045,21.775 22.8,22.53 22.8,34.45 C4.1 23.021,34.671 24.332,34.671 24.336,34.666 25.4,34.666
ADC_AIN0_POT1_ACC: C14.1 R14.1 TP10.TP U4.4 | length 33.9
  Top Layer w0.254: U4.4@33.501,17.75 U4.4 31.788,17.725 31.25,17.187 C14.1 31.25,14 31.5,13.75 35.825,13.75 36.295,14.22 R14.1 40.31,20.225 42.5,22.416 TP10.TP
ADC_AIN1_POT2_ACC: C10.1 R12.1 TP8.TP U4.5 | length 7
  Top Layer w0.254: U4.5 32.501,18.225 32.214,18.512 C10.1 R12.1 32.214,21.39 32.5,21.675 33.219,21.675 33.224,21.68 33.614,21.68 33.9,21.966 TP8.TP
ADC_AIN2_POT1_BRAKE: C7.1 R10.1 TP6.TP U4.6 | length 6.9
  Top Layer w0.254: U4.6 30.25,18.225 30.589,18.564 C7.1 R10.1 31.17,20.975 31.51,21.315 31.51,21.855 TP6.TP
ADC_AIN4_STEERING_ANGLE_SENSOR: C18.1 R17.1 TP2.TP U4.7 | length 10.5
  Top Layer w0.254: TP2.TP 26.112,23.7 26.375,23.437 26.375,18.323 26.342,18.291 ; R17.1@25.47,18.17 R17.1@25.59,18.291 ; R17.1 R17.1@25.59,18.291 ; U4.7 27.86,17.725 C18.1 27.095,18.291 26.342,18.291 ; R17.1@25.59,18.291 26.342,18.291
AIN0_POT1_ACC: C12.1 P3.1 R13.2 TP9.TP | length 18.1
  Top Layer w0.254: R13.2 32.947,35.752 34.996,35.752 35.496,36.252 35.496,38.677 35.818,39 C12.1 P3.1 39.182,41.02 TP9.TP
AIN1_POT2_ACC: C8.1 P3.4 R11.2 TP7.TP | length 7.4
  Top Layer w0.254: P3.4 C8.1 33.369,38.207 ; TP7.TP 33.275,38.112 33.369,38.207 ; R11.2 34.721,38.207 33.369,38.207
AIN2_POT1_BRAKE: C5.1 P2.1 R8.2 R9.2 TP5.TP | length 13.5
  Top Layer w0.254: R8.2 15.683,38.473 C5.1 ; P2.1 C5.1 ; TP5.TP 18.295,38.557 ; v1(19.55,38.557) 18.295,38.557 ; v1(22.8,38.557) 23.88,38.557 R9.2 ; C5.1 16,38.557 18.295,38.557
  Bottom Layer w0.254: v1(19.55,38.557) v1(22.8,38.557)
AIN4_STEERING_ANGLE_SENSOR: C16.1 P5.2 R15.2 R16.2 TP1.TP | length 29.4
  Top Layer w0.254: P5.2@8.61,33.057 P5.2 9.401,32.95 C16.1 11.7,32.225 13.461,30.464 v1(19.551,30.464) ; TP1.TP 28.803,27.733 28.803,30.646 R16.2 28.915,30.783 v1(28.915,31.921) 28.915,33.275 R15.2
  Bottom Layer w0.254: v1(19.551,30.464) 26.371,30.464 27.827,31.921 v1(28.915,31.921)
GND: C4.2 C5.2 C6.2 C7.2 C8.2 C9.2 C10.2 C11.2 C12.2 C13.2 C14.2 C16.2 C17.2 C18.2 C19.2 C20.2 C21.2 LED1.2 P1.2 P2.2 P3.2 P3.3 P4.1 P4.2 P4.3 P4.4 P4.26 P4.27 P4.28 P4.29 P5.3 P5.4 TP4.TP U1.4 U2.4 U4.1 U4.3 U5.2 U5.5 | length 48.8
  Top Layer w0.254: v1(9.294,18.512) LED1.2 9.959,17.5 10.525,18.066 TP4.TP ; C16.2 13.975,32.95 v1(14,32.925) ; P2.2 v1(13.8,42.5) ; C5.2 16.487,37.007 v1(16.98,37.5) ; v1(16.02,9) P4.26 P4.27 ; v1(16.02,10) P4.28 ; v1(16.5,32.47) C21.2 ; v1(16.98,9.5) P4.27 ; v1(16.98,10.5) P4.29 P4.28 ; v1(17.75,33.65) 18.01,33.91 U5.2 ; v1(18.1,31.55) C20.2 ; v1(18.725,33.521) U5.5 ; P4.1 P4.2 ; v1(23.89,18.995) 23.386,19.5 P4.4 P4.3 ; v1(23.957,20.575) 22.375,20.575 P4.2 ; v1(24.332,19.741) 24.072,20 P4.3 ; v1(25.15,15.615) C19.2 ; C18.2 27.307,19.853 v1(27.307,20.975) ; v1(28.265,19.475) C7.2 ; C6.2@28.57,38.695 28.564,38.701 C6.2 ; C8.2 32.014,36.742 v1(32.014,35.746) ; C14.2 33.539,14.75 v1(33.564,14.725) ; v1(33.476,15.54) U4.1 ; U4.3 v1(35.15,17.225) ; C10.2 34.425,19.475 v1(34.5,19.55) ; v1(33.9,43.97) P3.3 33.9,39.345 v1(33.995,39.25) ; v1(35.145,39.187) 35.145,39.301 35.9,40.057 P3.2 v1(35.9,43.97) ; P4.27 P4.28 ; P4.3 P4.2
  other v1: 4,5.464 9,5.464 14,5.464 19,5.464 24,5.464 29,5.464 34,5.464 39,5.464 44,5.464 6.5,10.464 11.5,10.464 31.5,10.464 36.5,10.464 41.5,10.464 46.5,10.464 14,15.464 39,15.464 44,15.464 6.5,20.464 11.5,20.464 41.5,20.464 46.5,20.464 9,25.464 14,25.464 19,25.464 29,25.464 34,25.464 39,25.464 44,25.464 11.552,28.981 6.5,29.057 21.75,29.166 24.343,29.435 6.5,30.464 11.5,30.464 41.5,30.464 46.5,30.464 33.187,31 21.75,32.846 28.244,33.43 36.779,33.452 24.154,33.602 35.595,34.473 4,35.464 44,35.464 40.334,36.332 23,37.188 28.535,37.471 40.31,38.21 6.5,40.464 11.5,40.464 21.5,40.464 41.5,40.464 46.5,40.464 4,45.464 14,45.464 29,45.464 34,45.464 39,45.464 44,45.464
NetC6_1: C6.1 R9.1 U1.5 | length 3.6
  Top Layer w0.254: R9.1 C6.1 27.182,38.668 27.35,38.5 U1.5
NetC9_1: C9.1 R11.1 U2.3 | length 3.7
  Top Layer w0.254: R11.1 37.063,37.465 ; U2.3 37.375,36.521 37.063,36.832 37.063,37.465 ; C9.1 37.856,37.465 37.063,37.465
NetC13_1: C13.1 R13.1 U2.5 | length 5.1
  Top Layer w0.254: R13.1 33.115,32.382 C13.1 36.725,32.382 U2.5
NetC17_1: C17.1 R16.1 U1.3 | length 3.5
  Top Layer w0.254: C17.1 26.461,30.646 ; U1.3 26.7,31.493 26.461,31.254 26.461,30.646 ; R16.1 26.461,30.646
NetLED1_1: LED1.1 R1.2 | length 1.4
  Top Layer w0.254: R1.2@7.794,16.065 LED1.1
NetR10_2: R10.2 U1.6 U1.7 | length 18.8
  Top Layer w0.254: U1.7 U1.6 v1(26.7,35.515) ; R10.2 29.039,22.925 30.076,23.962 v1(30.076,31.921)
  Bottom Layer w0.254: v1(26.7,35.515) 27.4,35.515 30.076,32.838 v1(30.076,31.921)
NetR12_2: R12.2 U2.1 U2.2 | length 23.1
  Top Layer w0.254: R12.2 40.225,20.975 40.5,21.25 40.5,34.571 39.5,35.571 U2.1 U2.2
NetR14_2: R14.2 U2.6 U2.7 | length 11.8
  Top Layer w0.254: v1(35.771,28.176) 35.771,22.929 36.25,22.45 36.25,21.75 R14.2@36.295,21.795 ; v1(37.375,29.896) U2.6 U2.7
  Bottom Layer w0.254: v1(35.771,28.176) 35.771,29.63 36.036,29.896 v1(37.375,29.896)
NetR17_2: R17.2 U1.1 U1.2 | length 16.1
  Top Layer w0.254: R17.2@25.47,19.72 R17.2 25.47,19.882 23.5,21.851 23.5,32.466 U1.1 U1.2
PB6/USART1_TX: P4.34
PB7/USART1_RX: P4.33
PB8/I2C1_SCL: P4.32
PB9/I2C1_SDA: P4.31
PB10_ADC_I2C_SCL: P4.14 R3.2 TP12.TP U4.10 | length 12.7
  Top Layer w0.254: P4.14 22.314,14.486 29.076,14.486 ; R3.2@27.301,12.08 R3.2 28.824,12 TP12.TP 29.076,12.252 29.076,14.486 ; U4.10 29.076,14.486
PB11_ADC_I2C_SDA: P4.13 R4.2 TP13.TP U4.9 | length 12
  Top Layer w0.254: P4.13 23.965,15 v1(24.03,15.065) 24.059,15.036 25.685,15.036 25.72,15.071 27.75,15.071 27.75,16.325 28.15,16.725 U4.9 ; v1(25.345,13.75) 25.345,13.709 25.857,13.198 R4.2
  Bottom Layer w0.254: v1(24.03,15.065) v1(25.345,13.75)
PC13: P4.30
PE2_ADC_INTERRUPT: P4.15 R2.2 TP11.TP U4.2 | length 19.7
  Top Layer w0.254: P4.15 23.707,14 24.475,13.232 24.475,12.124 R2.2 24.351,11.625 24.751,11.225 24.776,11.25 28.915,11.25 ; TP11.TP 28.915,11.25 ; v1(30.61,16.725) 30.61,16.01 30.076,15.476 30.076,11.473 29.854,11.25 28.915,11.25 ; v1(32,16.725) U4.2
  Bottom Layer w0.254: v1(30.61,16.725) v1(32,16.725)
pads on no net: P1. P2.3 P3.7 P4. P4.5 P4.6 P4.7 P4.8 P4.9 P4.10 P4.11 P4.12 P4.16 P4.17 P4.18 P4.19 P4.20 P4.21 P4.22 P4.23 P4.24 P4.25 P4.35 P4.36 P4.37 P4.38 P4.39 P4.46 P5.7

## Polygon pours and split planes (outlines as drawn)
GND on Bottom Layer "Bottom Layer-GND" (solid, pour order 4): 0,50 50,50 50,0 0,0 0.414,0.414 0.414,49.586 3.67,46.33 3.67,45.99
no net on Bottom Layer "Bottom Layer-No Net" (solid, pour order 6): 55,38.824
GND on Top Layer "GND_L01_P002" (solid, pour order 2): 0,0 0,50 50,50 50,0

## Keep-outs
Top Layer:
  lines w0.254: 0,0 0,50
Keep-Out Layer:
  the board outline again, w0.254

## Other copper
Top Layer:
  region net NetR17_2: 25.4,32.466
Bottom Layer:
  text "MS40010 REV 3.0" at 16.421,48.339 h0.8

## Silkscreen, mask and mechanical layers (free items; w line width, h text height)
Top Overlay:
  lines w0.254: 23,30 15,30 15,0 50,0 50,30 29.854,30
  text "BRAKE" at 5,42.281 h0.8
  text "ACCEL" at 42.6,40.79 h0.8
  text "STEERING ANGLE" at 1.433,23.352 h0.8
  text "GND" at 7.194,19.32 h0.8
  text "12V" at 7.194,13.218 h0.8
  text "POWER" at 1.464,9.5 h0.8
  text "PEDAL BOARD  / REV 3.0" at 0.99,6 h0.8